# Altium PCB PCB.PcbDoc
Units mm, origin at the board's own origin, x right, y up, seen from the top; angles counter-clockwise.
Board outline 44.8 x 23.7 mm, 2 copper layers (Top Layer, Bottom Layer), stack 1.18 mm thick; 16 components, 13 nets, 70 pads, 17 vias.
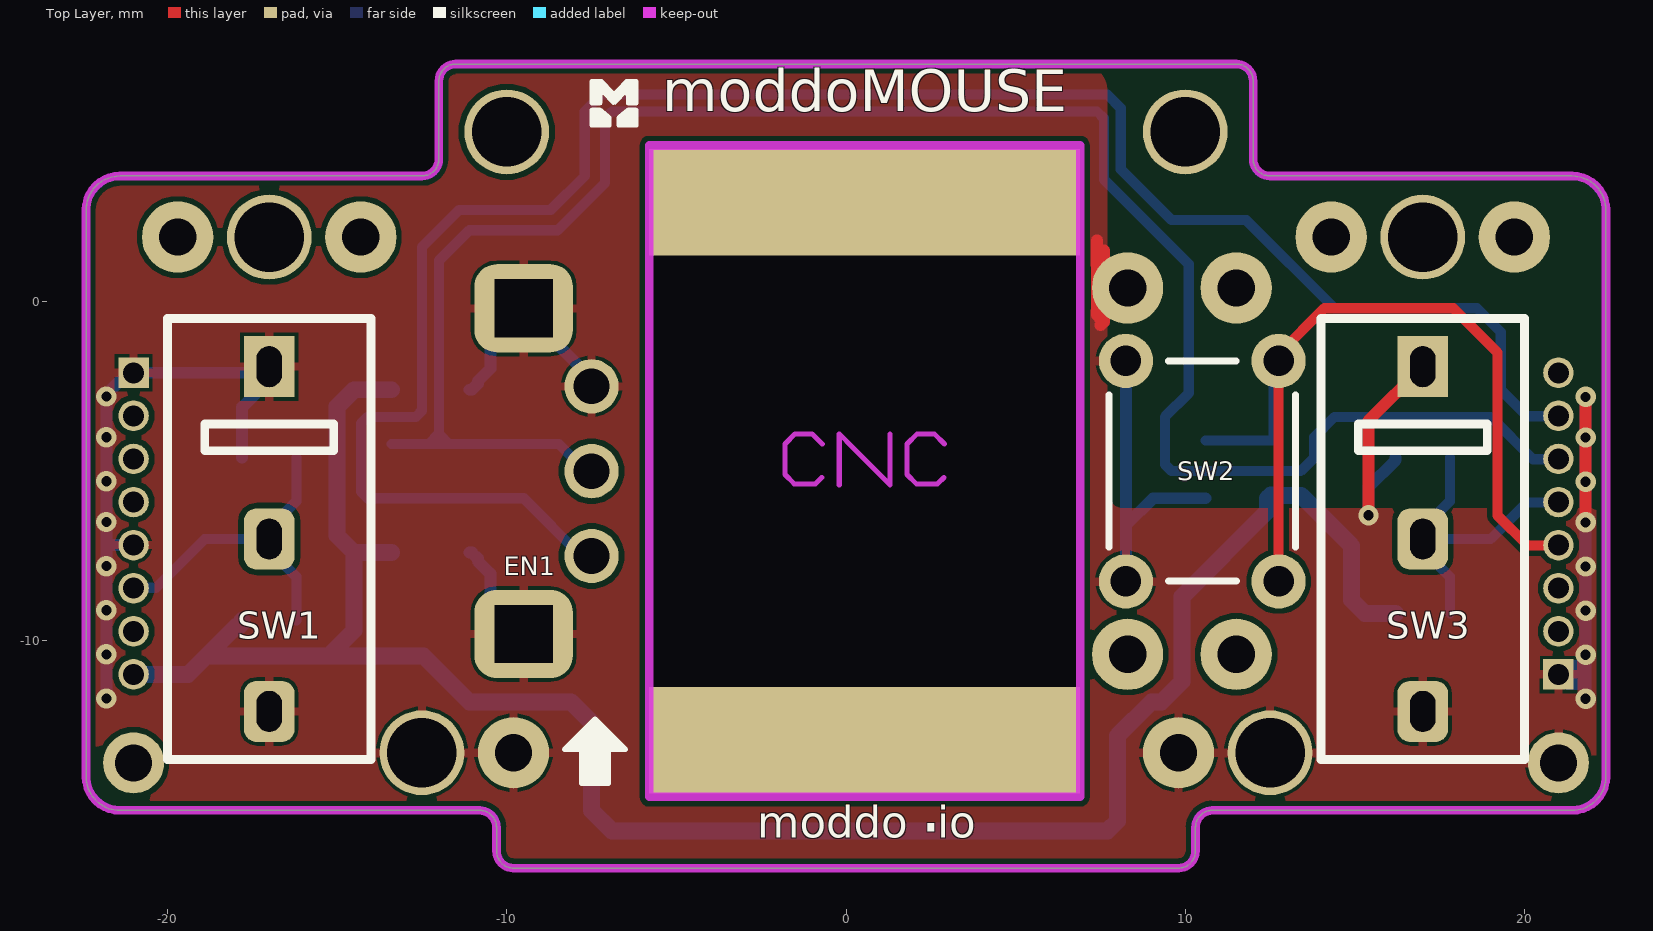
[diagram p0: Top Layer view]
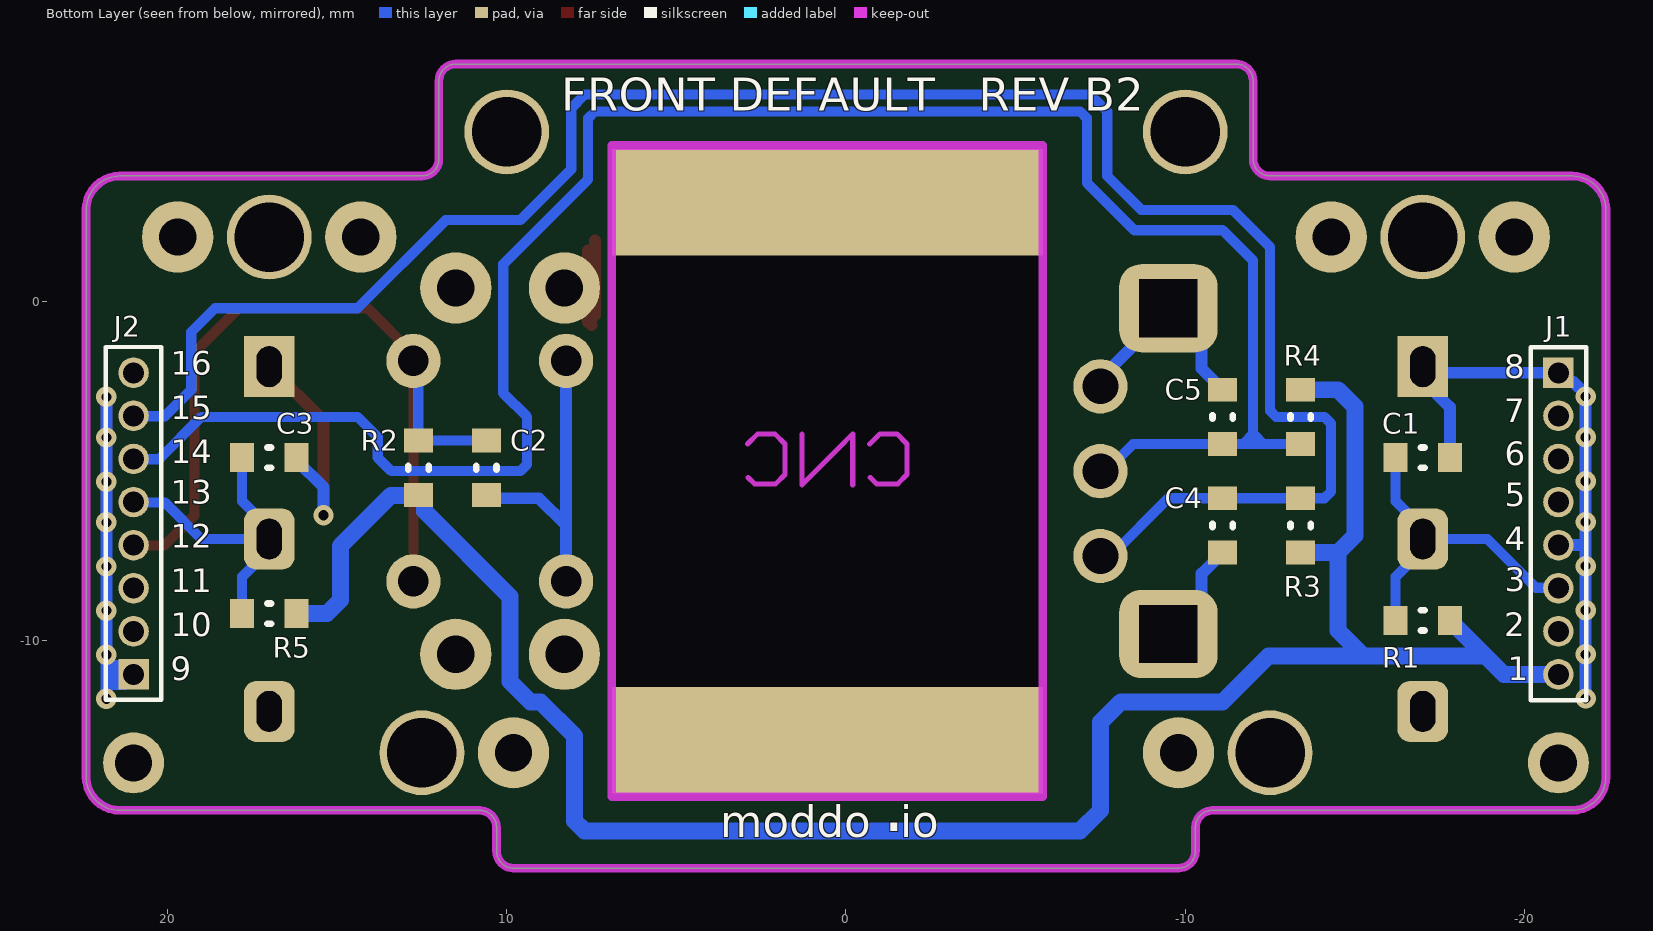
[diagram p1: Bottom Layer view, seen from below]
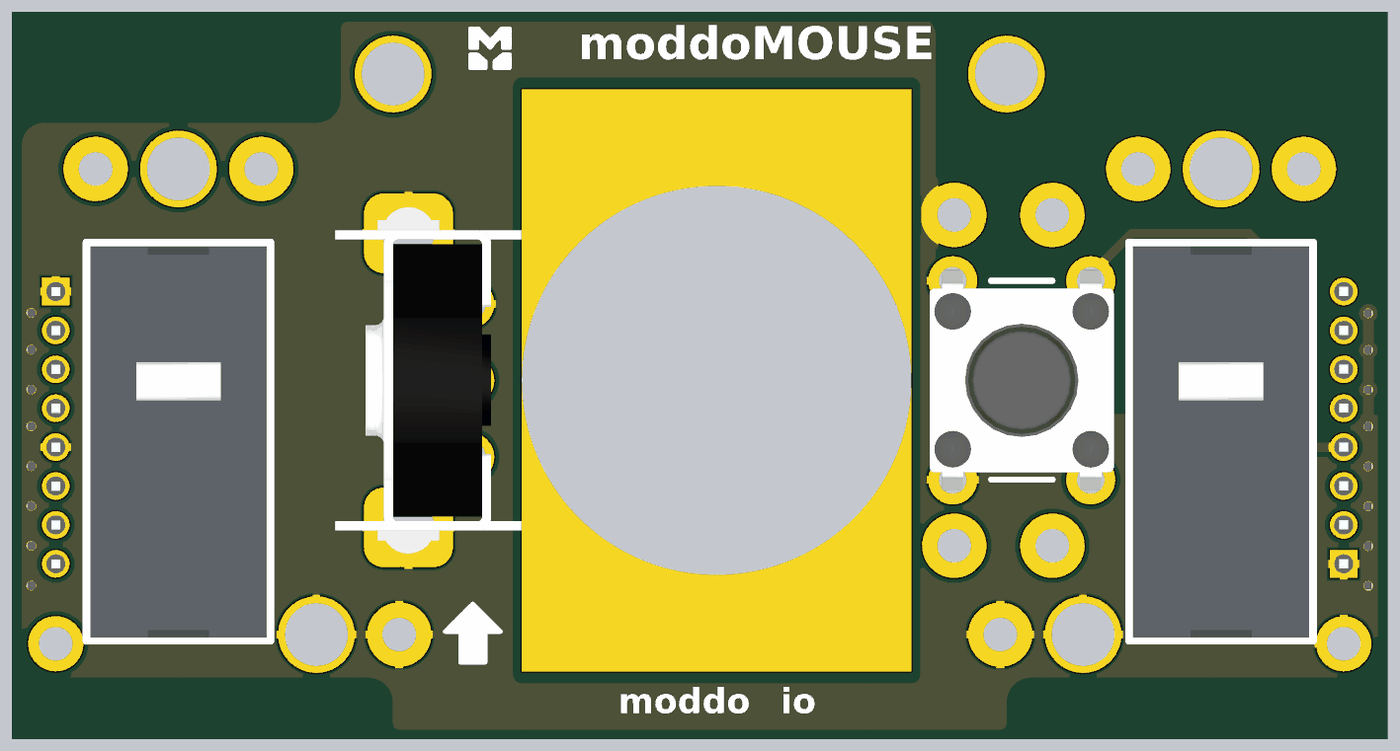
[diagram p2: 3D render of the assembled board from above, using the file's embedded part models]
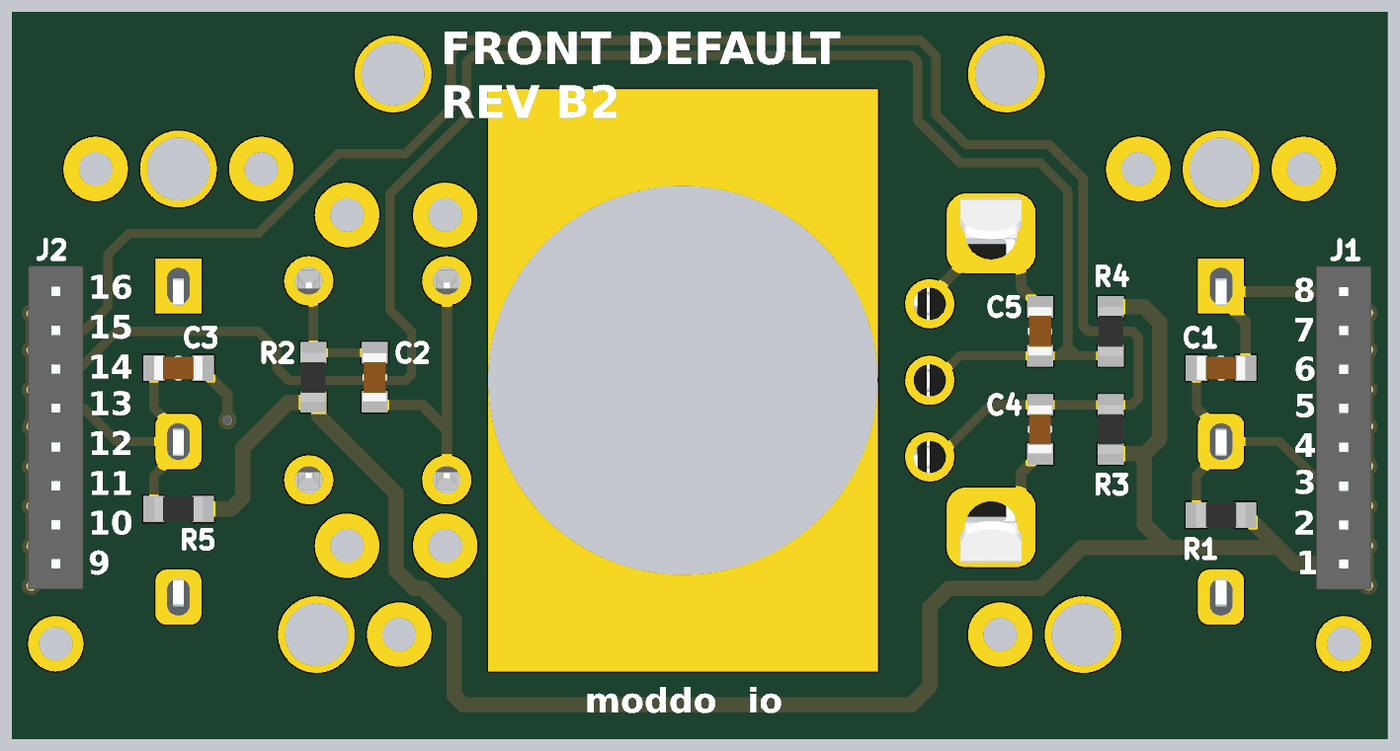
[diagram p3: 3D render of the assembled board from below, using the file's embedded part models]

## Layer stack, top to bottom
Top Solder: solder mask 0.0102, Solder Resist, Dk 3.5
Top Layer: signal copper 0.0356
Dielectric 1: dielectric 1.1086, FR-4, Dk 4.8
Bottom Layer: signal copper 0.0356
Bottom Solder: solder mask 0.0102, Solder Resist, Dk 3.5

## Board outline
-21.4,-15 -10.8,-15 cw(c-10.8,-15.5) -10.3,-15.5 -10.3,-16.2 ccw(c-9.8,-16.2) -9.8,-16.7 9.8,-16.7 ccw(c9.8,-16.2) 10.3,-16.2 10.3,-15.5 cw(c10.8,-15.5) 10.8,-15 21.4,-15 ccw(c21.4,-14) 22.4,-14 22.4,2.7 ccw(c21.4,2.7) 21.4,3.7 12.5,3.7 cw(c12.5,4.2) 12,4.2 12,6.5 ccw(c11.5,6.5) 11.5,7 -11.5,7 ccw(c-11.5,6.5) -12,6.5 -12,4.2 cw(c-12.5,4.2) -12.5,3.7 -21.4,3.7 ccw(c-21.4,2.7) -22.4,2.7 -22.4,-14 ccw(c-21.4,-14)

## Design rules (kind name [scope] priority, off if disabled: settings)
BoardOutlineClearance [All] p1: gap=0.2 ignorepadtopadclearanceinfootprint=FALSE
Clearance GND_bot [InNamedPolygon('GND_bot')] p1: gap=0.2 ignorepadtopadclearanceinfootprint=FALSE
Clearance GND_top [InNamedPolygon('GND_top')] p2: gap=0.1 ignorepadtopadclearanceinfootprint=FALSE
Clearance [All] p3: gap=0.16 ignorepadtopadclearanceinfootprint=FALSE
HoleSize [All] p1: absolutevalues=TRUE maxlimit=20 minlimit=0.025 maxpercent=80.000 minpercent=20.000
MinimumSolderMaskSliver [All] p1: minsoldermaskwidth=0.05
PolygonConnect [All] p1: thpad.connectstyle=Relief thpad.reliefconductorwidth=0.254 thpad.reliefentries=4 thpad.polygonreliefangle="90 Angle" thpad.airgapwidth=0.1 smdpad.connectstyle=Relief smdpad.reliefconductorwidth=0.254 smdpad.reliefentries=4 smdpad.polygonreliefangle="90 Angle" smdpad.airgapwidth=0.1 via.connectstyle=Direct via.reliefconductorwidth=0.254 via.reliefentries=4 via.polygonreliefangle="90 Angle" via.airgapwidth=0.254
RoutingVias [All] p1: holewidth=0.3 width=0.4 viastyle="Through Hole" minholewidth=0.3 minwidth=0.4 maxholewidth=2 maxwidth=10
SilkToSilkClearance [All] p1: silktosilkclearance=0.01
SilkToSolderMaskClearance [IsPad] p1: minsilkscreentomaskgap=0.001 clearancetoexposedcopper=TRUE
SolderMaskExpansion [All] p1: expansion=0.05 istentingtop=FALSE
SupplyNets "Schematic Supply Nets_1" [InNet('GND')] p1: voltage=0.000
SupplyNets "Schematic Supply Nets" [InNet('VDD_EXP')] p2: voltage=0.000
SupplyNets "Schematic Supply Nets_2" [InNet('VBUS')] p3: voltage=0.000
UnRoutedNet [All] p1: checkbadconnections=TRUE
Width [All] p1: maxlimit=2.54 minlimit=0.089 preferedwidth=0.254
25 further rules are at their usual default settings.

## Components (designator, comment, footprint, x,y, rotation, side; value= is the part's Value field where it differs from the comment)
C1 "CL05B104KA5NNNC" CAP0603 -17,-4.6 r0 bottom value=DNP
C2 "CL05B104KA5NNNC" CAP0603 10.6,-4.9 r90 bottom value=DNP
C3 "CL05B104KA5NNNC" CAP0603 17,-4.6 r0 bottom value=DNP
C4 "CL05B104KA5NNNC" CAP0603 -11.1,-6.6 r90 bottom value=DNP
C5 "CL05B104KA5NNNC" CAP0603 -11.1,-3.4 r270 bottom value=DNP
EN1 "" THROUGH_SHAFT_ENCODER_9MM -7.5,-5 r90 top
J1 "1.27mm_8pins" HEADER_MALE_1_27mm_8p_HEIGHT_1mm -21,-2.1 r270 bottom
J2 "1.27mm_8pins" HEADER_MALE_1_27mm_8p_HEIGHT_1mm 21,-10.99 r90 bottom
R1 "" RES0603 -17,-9.4 r0 bottom value=DNP
R2 "" RES0603 12.6,-4.9 r90 bottom value=DNP
R3 "" RES0603 -13.4,-6.6 r90 bottom value=DNP
R4 "" RES0603 -13.4,-3.4 r270 bottom value=DNP
R5 "" RES0603 17,-9.2 r0 bottom value=DNP
SW1 "Microswitch" Microswitch -17,-7 r0 top
SW2 "TS02-66-70-BK-100-SCR-D" TS02-66-70-BK-100-SCR-D 10.5,-5 r90 top
SW3 "Microswitch" Microswitch 17,-7 r0 top

## Footprints (in the part's own frame and the unit in brackets; to place one, negate y for a bottom-side part, rotate by r counter-clockwise, add the part's x,y. Pads: shape width x height; smd on the part's side, far side on the other; paste and mask are expansions set on the pad)
CAP0603 [mm]
  rect 0.7x0.85 smd mask+0.05: 1(-0.8,0) 2(0.8,0)
  silkscreen extent -0.05,-0.3 0.05,0.3, body extent -0.8,-0.4 0.8,0.4, height 0.79
HEADER_MALE_1_27mm_8p_HEIGHT_1mm [mm]
  rect 0.9x0.9 hole 0.62 mask+0.05: 1(0,0)
  round 0.9 hole 0.62 mask+0.05: 2(1.27,0) 3(2.54,0) 4(3.81,0) 5(5.08,0) 6(6.35,0) 7(7.62,0) 8(8.89,0)
  silkscreen extent -0.75,-0.82 9.65,0.82, body extent -0.83,-0.9 9.73,0.9, height 4.46
Microswitch [mm]
  rect 1.5x1.8 hole 0.75 slot 1.2 at 90 deg mask+0.05: 1(0,5.08)
  rrect50% 1.5x1.8 hole 0.75 slot 1.2 at 90 deg mask+0.05: 2(0,0) 3(0,-5.08)
  silkscreen extent -3,-6.5 3,6.5, body extent -2.88,-6.4 2.88,6.35, height 7.25
RES0603 [mm]
  rect 0.7x0.85 smd mask+0.05: 1(-0.8,0) 2(0.8,0)
  silkscreen extent -0.05,-0.3 0.05,0.3, body extent -0.8,-0.4 0.8,0.4, height 0.47
THROUGH_SHAFT_ENCODER_9MM [mm]
  round 1.6 hole 1.05 mask+0.05: A(-2.5,0) B(0,0) C(2.5,0)
  rrect50% 2.6x2.9 hole 1.7 square mask+0.05: MOUNT(-4.8,2) MOUNT(4.8,2)
  body extent -5.94,-1.7 5.94,4.4, height 12.6
TS02-66-70-BK-100-SCR-D [mm]
  round 1.6 hole 0.9: 1(-3.25,2.25) 2(3.25,2.25) 3(-3.25,-2.25) 4(3.25,-2.25)
  silkscreen extent -3.24,-2.75 3.25,2.75, body extent -3.6,-3 3.6,3, height 7

## Part data
C1 C2 C3: library part C0402-1µ0, "CL05 Series 0402 0.1 uF 25 V ±10% X7R Multilayer Ceramic Chip Capacitor"
C4 C5: library part C0402-1µ0, "CL05 Series 0402 0.1 uF 25 V ±10% X7R Multilayer Ceramic Chip Capacitor", Case Code (Imperial)=0402, Case Code (Metric)=1005, Manufacturer=Samsung, Max Operating Temperature=125°C, Min Operating Temperature=-55°C, Tolerance=10%, Voltage Rating=25V, Case/Package=0402, Category="Ceramic Capacitors", ComponentLink1Description=http://www.samsungsem.com/kr/support/product-search/mlcc/CL05B104KA5NNNC.jsp?src-supplier=Digikey, ComponentLink1URL=http://www.samsungsem.com/kr/support/product-search/mlcc/CL05B104KA5NNNC.jsp?src-supplier=Digikey, ComponentLink2Description=https://datasheet.octopart.com/CL05B104KA5NNNC-Samsung-Electro-Mechanics-datasheet-116890910.pdf?src-supplier=Future+Electronics, ComponentLink2URL=https://datasheet.octopart.com/CL05B104KA5NNNC-Samsung-Electro-Mechanics-datasheet-116890910.pdf?src-supplier=Future+Electronics, ComponentLink3Description=https://datasheet.octopart.com/CL05B104KA5NNNC-Samsung-datasheet-8326407.pdf?src-supplier=TME, ComponentLink3URL=https://datasheet.octopart.com/CL05B104KA5NNNC-Samsung-datasheet-8326407.pdf?src-supplier=TME, Height=550um, Length=0.039inch, Manufacturer Part Number=CL05B104KA5NNNC, Material=Ceramic, Mounting Technology="Surface Mount", Packaging="Cut Tape", Pricing 1="10000=0.0018, 20000=0.00179, 40000=0.00179, 60000=0.00178, 80000=0.00177 (USD)", RoHS=Yes, RoHS Compliant=Yes, Series=CL, Stock 1=2800000, Supplier 1=Avnet, Supplier Part Number 1=CL05B104KA5NNNC, Thickness=0.022inch, Voltage Rating (DC)=25V, Width=0.02inch
EN1: library part EC10E1220501, "Mechanical Encoder Rotary Incremental Hollow 5mN.m Right Angle Quadrature Digital Square Wave Through Hole PC Pin"
J1 J2: "1.27mm 1.27mm 1A 1 Gold -40℃~+105℃ 8P Phosphor Bronze Through Hole 1x8P Top 4.3mm Square Hole Through Hole,P=1.27mm Female Headers ROHS"
R1 R2 R3 R4 R5: library part Res1
SW2: "Switch Tactile Spst-no 0.05A 12V", Color=Black, Contact Resistance=100mΩ, Insulation Resistance=100MΩ, Manufacturer="Same Sky", Max Current Rating=50mA, Max Operating Temperature=80°C, Max Voltage Rating (DC)=12V, Min Operating Temperature=-30°C, Operating Force=980mN, Supplier Part Number 1=2223-TS02-66-70-BK-100-SCR-D-ND, Category="Tactile Switches", ComponentLink1Description=https://datasheet.octopart.com:443/TS02-66-70-BK-100-SCR-D-Same-Sky-datasheet-183540777.pdf?src-supplier=Same+Sky, ComponentLink1URL=https://datasheet.octopart.com:443/TS02-66-70-BK-100-SCR-D-Same-Sky-datasheet-183540777.pdf?src-supplier=Same+Sky, ComponentLink2Description=https://datasheet.octopart.com:443/TS02-66-70-BK-100-SCR-D-Same-Sky-datasheet-181920466.pdf?src-supplier=Same+Sky, ComponentLink2URL=https://datasheet.octopart.com:443/TS02-66-70-BK-100-SCR-D-Same-Sky-datasheet-181920466.pdf?src-supplier=Same+Sky, ComponentLink3Description=https://datasheet.octopart.com:443/TS02-66-70-BK-100-SCR-D-Same-Sky-datasheet-181920465.pdf?src-supplier=Same+Sky, ComponentLink3URL=https://datasheet.octopart.com:443/TS02-66-70-BK-100-SCR-D-Same-Sky-datasheet-181920465.pdf?src-supplier=Same+Sky, ComponentLink4Description=https://datasheet.octopart.com:443/TS02-66-70-BK-100-SCR-D-CUI-Devices-datasheet-175928973.pdf?src-supplier=Same+Sky, ComponentLink4URL=https://datasheet.octopart.com:443/TS02-66-70-BK-100-SCR-D-CUI-Devices-datasheet-175928973.pdf?src-supplier=Same+Sky, ComponentLink5Description=https://datasheet.octopart.com:443/TS02-66-70-BK-100-SCR-D-CUI-Devices-datasheet-155929901.pdf?src-supplier=Same+Sky, ComponentLink5URL=https://datasheet.octopart.com:443/TS02-66-70-BK-100-SCR-D-CUI-Devices-datasheet-155929901.pdf?src-supplier=Same+Sky, ComponentLink6Description=https://datasheet.octopart.com:443/TS02-66-70-BK-100-SCR-D-CUI-Devices-datasheet-180438921.pdf?src-supplier=IHS, ComponentLink6URL=https://datasheet.octopart.com:443/TS02-66-70-BK-100-SCR-D-CUI-Devices-datasheet-180438921.pdf?src-supplier=IHS, ComponentLink7Description=https://datasheet.octopart.com:443/TS02-66-70-BK-100-SCR-D-Same-Sky-datasheet-182881588.pdf?src-supplier=Electro+Sonic, ComponentLink7URL=https://datasheet.octopart.com:443/TS02-66-70-BK-100-SCR-D-Same-Sky-datasheet-182881588.pdf?src-supplier=Electro+Sonic, ComponentLink8Description=https://datasheet.octopart.com:443/TS02-66-70-BK-100-SCR-D-Same-Sky-datasheet-189105763.pdf?src-supplier=Master+Electronics, ComponentLink8URL=https://datasheet.octopart.com:443/TS02-66-70-BK-100-SCR-D-Same-Sky-datasheet-189105763.pdf?src-supplier=Master+Electronics, ComponentLink9Description=https://datasheet.octopart.com:443/TS02-66-70-BK-100-SCR-D-Same-Sky-datasheet-188930957.pdf?src-supplier=TME, ComponentLink9URL=https://datasheet.octopart.com:443/TS02-66-70-BK-100-SCR-D-Same-Sky-datasheet-188930957.pdf?src-supplier=TME, ComponentLink10Description=https://octopart.com:443/opatz8j6/c1?t=HLP653kfKUnNyLRaY-FaFV0j9z0a6ljyJcAd0g2ioQ_AonTMmNTwU4IVPJnMdy9eIxVQzuuD2Zu3pf7N-gy-D9NxffwwpVrbegg9M7luCdtijzqw1HD8XYM8rr4LEKe8WthgaTICQcVnT4EdaXrmdMRbIv_syAbN7vWeLxd063wKgO5rufBQuoDPxsRiZXaF5zj2j9QuxBlB29jUVY_5bRBrvllIk-1OXrlBRrRDb8qAyP_q7sjIWfGfu8FS9OuYKaYi-jPcp7RsNayvVhYY7F0QXbvDBl27IGeqaU01JtaMs89zYB4bZG8DLFkocbUh-1087gIX4bVPJQCA7y3bbMeEPsiQw70TGyHqnWLUSeqz4Ubouw&src-supplier=Compliance+Statements, ComponentLink10URL=https://octopart.com:443/opatz8j6/c1?t=HLP653kfKUnNyLRaY-FaFV0j9z0a6ljyJcAd0g2ioQ_AonTMmNTwU4IVPJnMdy9eIxVQzuuD2Zu3pf7N-gy-D9NxffwwpVrbegg9M7luCdtijzqw1HD8XYM8rr4LEKe8WthgaTICQcVnT4EdaXrmdMRbIv_syAbN7vWeLxd063wKgO5rufBQuoDPxsRiZXaF5zj2j9QuxBlB29jUVY_5bRBrvllIk-1OXrlBRrRDb8qAyP_q7sjIWfGfu8FS9OuYKaYi-jPcp7RsNayvVhYY7F0QXbvDBl27IGeqaU01JtaMs89zYB4bZG8DLFkocbUh-1087gIX4bVPJQCA7y3bbMeEPsiQw70TGyHqnWLUSeqz4Ubouw&src-supplier=Compliance+Statements, ComponentLink11Description=https://octopart.com:443/opatz8j6/c1?t=70fxgALqLpNjG_K9rPovwjysU7jzIpdyzzOEfmqjcTOs-6ROmuQBhYmqs_ZuAcaqBIATg-po2KHNT8FFRDBRYIL0_klCBg093_lnv4m-VGCcxpH2tv7ZoDf42NqrFcaiS2p9v1HLMgL58Bvgkh7fWiFupQqqJcboTLtiFznQTeSRB_YWVsAUcqmYMh2aDwt2rP0HYapAehBpzXszozGpJmInMSOs89qtbfp5XPDIds3FFewjYOYywpW73NyliGrA4cmELQKKu9WCRcDeI_p_KBFSh0TkHYgoFAYL7Wsi2MddJKeTwre8sAVdxTEufmEfLTJTVqSle3Q2DFxEX0bFsJRtku0Ewjz7V8cehC3yuXL6NI5jn2H_FXM&src-supplier=Compliance+Statements, ComponentLink11URL=https://octopart.com:443/opatz8j6/c1?t=70fxgALqLpNjG_K9rPovwjysU7jzIpdyzzOEfmqjcTOs-6ROmuQBhYmqs_ZuAcaqBIATg-po2KHNT8FFRDBRYIL0_klCBg093_lnv4m-VGCcxpH2tv7ZoDf42NqrFcaiS2p9v1HLMgL58Bvgkh7fWiFupQqqJcboTLtiFznQTeSRB_YWVsAUcqmYMh2aDwt2rP0HYapAehBpzXszozGpJmInMSOs89qtbfp5XPDIds3FFewjYOYywpW73NyliGrA4cmELQKKu9WCRcDeI_p_KBFSh0TkHYgoFAYL7Wsi2MddJKeTwre8sAVdxTEufmEfLTJTVqSle3Q2DFxEX0bFsJRtku0Ewjz7V8cehC3yuXL6NI5jn2H_FXM&src-supplier=Compliance+Statements, ComponentLink12Description=https://octopart.com:443/opatz8j6/c1?t=0M2gUtPNxCIFKztzr0ORoQp74-qqkM508TPT7wg6m0fN_GA_OkfieEk8EIqSK9t5NbTvw4RdocQjUPrVJcY4NvfdBN--JLXOnsBa5bEMLNaIzwiYtbFg_6z_wR3zqnDTdSeF_oIuOYO8CYFrj75SMWMnab9KxghoES98oqWa6u9tO-Rmbu1W1tT6emVTSCYp7BgLb3OBYN-dQzTQZIBGhGfaphAjKsycwfMKwTeGkST-ilBj1Z_gxNVAgV-6yKJLuy_GAbFai0Kg7uavY94pLOpbiRI-h0GWb66rsUlTT5xwqO7ZyWRlLnQY9NYeXMFqEYDrJCNP-b1rzYCCJcH7sxmr3xVo_XKPUQ&src-supplier=Compliance+Statements, ComponentLink12URL=https://octopart.com:443/opatz8j6/c1?t=0M2gUtPNxCIFKztzr0ORoQp74-qqkM508TPT7wg6m0fN_GA_OkfieEk8EIqSK9t5NbTvw4RdocQjUPrVJcY4NvfdBN--JLXOnsBa5bEMLNaIzwiYtbFg_6z_wR3zqnDTdSeF_oIuOYO8CYFrj75SMWMnab9KxghoES98oqWa6u9tO-Rmbu1W1tT6emVTSCYp7BgLb3OBYN-dQzTQZIBGhGfaphAjKsycwfMKwTeGkST-ilBj1Z_gxNVAgV-6yKJLuy_GAbFai0Kg7uavY94pLOpbiRI-h0GWb66rsUlTT5xwqO7ZyWRlLnQY9NYeXMFqEYDrJCNP-b1rzYCCJcH7sxmr3xVo_XKPUQ&src-supplier=Compliance+Statements, ComponentLink13Description=https://octopart.com:443/opatz8j6/c1?t=diif9Q9lWxKVNFgYf2ypxkBIpJy_xgH8lB9SlF-sgjeEzbBCUVmT_nzSoRgXF36nPrchZjg3iSgBGugOu1kM5DFk3dZCPjGsZ2AECwKBw0yNVqZziTPdJApiVqJ2N8tp3yywOshnCqmZxG2i-lqiFfHMSfwXJbIAb0IWzMQMxGRWHhSJomd94oD279jFTGt8oizERBWbfb88NO9_Xr3EVZhRepn2f-WGygd1GS9heeHI2QHR3-nScg2II5lErYeUXOg5oJ91TW5jc1ptKnvIg9-7FjmYCEPJ7ClYA3CtivUmUoH3UgqEViyww75S0eqfJ7jiv1ohBfmjBBBnsjsMwfP_bN0qkEs5FUvu0_Goiq3pWEomZw&src-supplier=Compliance+Statements, ComponentLink13URL=https://octopart.com:443/opatz8j6/c1?t=diif9Q9lWxKVNFgYf2ypxkBIpJy_xgH8lB9SlF-sgjeEzbBCUVmT_nzSoRgXF36nPrchZjg3iSgBGugOu1kM5DFk3dZCPjGsZ2AECwKBw0yNVqZziTPdJApiVqJ2N8tp3yywOshnCqmZxG2i-lqiFfHMSfwXJbIAb0IWzMQMxGRWHhSJomd94oD279jFTGt8oizERBWbfb88NO9_Xr3EVZhRepn2f-WGygd1GS9heeHI2QHR3-nScg2II5lErYeUXOg5oJ91TW5jc1ptKnvIg9-7FjmYCEPJ7ClYA3CtivUmUoH3UgqEViyww75S0eqfJ7jiv1ohBfmjBBBnsjsMwfP_bN0qkEs5FUvu0_Goiq3pWEomZw&src-supplier=Compliance+Statements, ComponentLink14Description=https://octopart.com:443/opatz8j6/c1?t=imcCfIDy5o_ml50jtfjPxlR6DZ_wJD5zN0zQzufCnUTvUT0YJEIpXllkHao9xdejupS_czezSO7NHYOkFFzvO-KWfitz_4VyM9E57VLf2lJat0Li5JMhp_PVSZeq-2lKDWqSwTzEPRMj8I_f-Bcni8gKS6mmu2GnDZ8MMk2UfHI6ioBV2HvYNDzpuGAzvtKEZz1R2H6q5jLC2OKgZnoSEYJSrhZ-HoMyrn1bi6_ivQyBh6WR3Osn0n3mf6szmji0OW0cS32L0RTDLzbe5apsoDXB1RAJOqIijn7fzRHDOhWtDUqiBOOdw2DWMA6LC7TFGd2P5An41jYudu2603zI8PWHVSPGioqRMTziF1Fy9Kg1Zw3IXdiPQyQ&src-supplier=Compliance+Statements, ComponentLink14URL=https://octopart.com:443/opatz8j6/c1?t=imcCfIDy5o_ml50jtfjPxlR6DZ_wJD5zN0zQzufCnUTvUT0YJEIpXllkHao9xdejupS_czezSO7NHYOkFFzvO-KWfitz_4VyM9E57VLf2lJat0Li5JMhp_PVSZeq-2lKDWqSwTzEPRMj8I_f-Bcni8gKS6mmu2GnDZ8MMk2UfHI6ioBV2HvYNDzpuGAzvtKEZz1R2H6q5jLC2OKgZnoSEYJSrhZ-HoMyrn1bi6_ivQyBh6WR3Osn0n3mf6szmji0OW0cS32L0RTDLzbe5apsoDXB1RAJOqIijn7fzRHDOhWtDUqiBOOdw2DWMA6LC7TFGd2P5An41jYudu2603zI8PWHVSPGioqRMTziF1Fy9Kg1Zw3IXdiPQyQ&src-supplier=Compliance+Statements, ComponentLink15Description=https://octopart.com:443/opatz8j6/c1?t=kKijr8Z3YtJHTTjWnXb3xh0DJP5EzxeX4UFkx4TEZ6Cz0Z832s2bRldFgYZlCpaXiK9LCmfdBkdCa6SQTrNfeR21pT66xN4z56ytO83LXIFW6jqhfe0BF4PCg9LZ01M04qLlAqJjGu9g9SeA4zCDxwvuczhHHSMbXOPUkjBKcuT-covQ3TDYxKJX1WQbLINFlqNmhVdmt0nNVmCHYY5UlYZquJcZxWugtPfk0hXKeUZrRbCaVG2WVxMsTTDZa3ihWnkhx37ifFF9Olm0_Nb0GN6vgv_2MEW77TYbpXRH10yY7gT6N9FBAuGfJTCPb3AxGTSm9otgR3_KqACkaD-fKVuVVtpYMw7tLA&src-supplier=Compliance+Statements, ComponentLink15URL=https://octopart.com:443/opatz8j6/c1?t=kKijr8Z3YtJHTTjWnXb3xh0DJP5EzxeX4UFkx4TEZ6Cz0Z832s2bRldFgYZlCpaXiK9LCmfdBkdCa6SQTrNfeR21pT66xN4z56ytO83LXIFW6jqhfe0BF4PCg9LZ01M04qLlAqJjGu9g9SeA4zCDxwvuczhHHSMbXOPUkjBKcuT-covQ3TDYxKJX1WQbLINFlqNmhVdmt0nNVmCHYY5UlYZquJcZxWugtPfk0hXKeUZrRbCaVG2WVxMsTTDZa3ihWnkhx37ifFF9Olm0_Nb0GN6vgv_2MEW77TYbpXRH10yY7gT6N9FBAuGfJTCPb3AxGTSm9otgR3_KqACkaD-fKVuVVtpYMw7tLA&src-supplier=Compliance+Statements, Contact Plating=Silver, Electrical Life=100kcycles, Height=3.5mm, Housing Material="Stainless Steel", Length=6mm, Lifecycle Status=Production, Manufacturer Part Number=TS02-66-70-BK-100-SCR-D, Number of Positions=1, Pricing 1="1=0.1, 10=0.093, 25=0.0872, 100=0.0788, 250=0.07328, 500=0.0692, 1000=0.06531, 3000=0.05961, 5000=0.0572 (USD)", REACH SVHC=Yes, RoHS=Compliant, Stock 1=2978, Supplier 1=DigiKey, Terminal Material=Brass, Throw Configuration=SPST

## Free pads (board coordinates)
  round 1.8 hole 1.1: ""(-21,-13.6) ""(21,-13.6)
  round 2.1 hole 1.1: ""(-19.7,1.9) ""(-14.3,1.9) ""(-9.8,-13.3) ""(8.3,-10.4) ""(8.3,0.4) ""(9.8,-13.3) ""(11.5,-10.4) ""(11.5,0.4) ""(14.3,1.9) ""(19.7,1.9)
  round 2.5 hole 2.05: ""(-17,1.9) ""(-12.5,-13.3) ""(-10,5) ""(10,5) ""(12.5,-13.3) ""(17,1.9)
  rect 12.7x19 hole 12.7 square unplated: ""(0.55,-5)

## Via types
v1: diameter 0.6, hole 0.3, Top Layer to Bottom Layer, tented both sides, 17 vias

## Nets (pads, with @x,y where several pads share a name; then routed paths per layer and width w, separated by ;. In a path a pad name is that pad's centre, name@x,y a point inside that pad or via, vN(x,y) a via of type N, cw(c..) or ccw(c..) an arc to the next point about the centre after c; other vN are vias at no path point)
BUTTON: J1.7
CLICK_LEFT: C1.2 J1.6 R1.2 SW1.2 | length 10.1
  Bottom Layer w0.3: J1.6 -20.989,-8.439 -20.339,-8.439 -18.9,-7 SW1.2 ; R1.2 -16.2,-8.109 -17,-7.309 SW1.2 ; C1.2 -16.2,-5.891 -17,-6.691 SW1.2
CLICK_MIDDLE: C2.2 J2.4 R2.2 SW2.3 SW2.4 | length 25.6
  Top Layer w0.3: SW2.3 SW2.4 12.75,-1.55 14.1,-0.2 17.9,-0.2 19.2,-1.5 19.2,-6.3 20.09,-7.19 J2.4@21,-7.19
  Bottom Layer w0.3: C2.2 R2.2 12.6,-1.9 SW2.4
CLICK_RIGHT: C3.2 J2.5 R5.2 SW3.2 | length 9.7
  Bottom Layer w0.3: R5.2 17.8,-8.109 17,-7.309 SW3.2 ; C3.2 17.8,-5.891 17,-6.691 SW3.2 ; J2.5@21,-5.92 20.08,-5.92 19,-7 SW3.2
ENC_A: C4.2 EN1.A J2.7 R3.2 | length 58.8
  Bottom Layer w0.3: EN1.A -7.8,-7.5 -9.5,-5.8 C4.2 R3.2 -14.1,-5.8 -14.3,-5.6 -14.3,-3.6 -14.1,-3.4 -12.676,-3.4 -12.5,-3.224 -12.5,1.6 -11.4,2.7 -8.7,2.7 -7.7,3.7 -7.7,5.6 -7.2,6.1 7.7,6.1 8.1,5.7 8.1,3.9 9.6,2.4 11.8,2.4 14.4,-0.2 18.6,-0.2 19.3,-0.9 19.3,-2.6 20.08,-3.38 J2.7@21,-3.38
ENC_B: C5.2 EN1.B J2.6 R4.2 | length 59.9
  Bottom Layer w0.3: R4.2 -12.3,-4.2 ; EN1.B -7.668,-5 -8.468,-4.2 C5.2 -11.7,-4.2 ; J2.6@21,-4.65 20.25,-4.65 19,-3.4 14.4,-3.4 13.8,-4 13.8,-4.6 13.4,-5 9.6,-5 9.4,-4.8 9.4,-3.4 10.1,-2.7 10.1,1.1 7.6,3.6 7.6,5.4 7.4,5.6 -6.9,5.6 -7.1,5.4 -7.1,3.5 -8.5,2.1 -11.1,2.1 -12,1.2 -12,-3.9 ; -12.3,-4.2 -12.076,-4.2 ; -12.3,-4.2 -12,-3.9 ; -12.076,-4.2 -11.7,-4.2 ; -12.076,-4.2 -12,-4.124 -12,-3.9 ; -12,-3.9 -11.7,-4.2
FRONT_GPIO: J1.2
FRONT_INT: J1.3
GND: C1.1 C2.1 C3.1 C4.1 C5.1 EN1.C EN1.MOUNT J1.1 J1.5 J2.1 pad.@8.3,0.4 pad.@9.8,-13.3 pad.@12.5,-13.3 pad.@21,-13.6 pad.@-9.8,-13.3 pad.@-12.5,-13.3 SW1.1 SW1.3 SW2.1 SW2.2 SW3.1 SW3.3 | length 63.3
  Top Layer w0.35: 7.4,1.8 7.4,-0.4 7.5,-0.5 ; 7.5,-0.7 7.6,-0.6 7.6,1.5 ; v1(15.4,-6.3) 15.4,-3.52 SW3.1 ; v1(21.8,-6.51) v1(21.8,-5.31) v1(21.8,-4.01) v1(21.8,-2.81)
  Bottom Layer w0.35: v1(-21.8,-11.7) v1(-21.8,-10.4) v1(-21.8,-9.1) v1(-21.8,-7.8) -21.8,-7.15 ; J1.5 -21.77,-7.18 -21.8,-7.15 ; C1.1 -17.8,-3.112 -17,-2.312 SW1.1 -17.18,-2.1 J1.1 -21.275,-2.375 -21.443,-2.375 -21.8,-2.732 v1(-21.8,-4) v1(-21.8,-5.3) v1(-21.8,-6.5) -21.8,-7.15 ; C4.1 -11.025,-7.4 -10.85,-7.575 -10.85,-7.65 -10.482,-8.018 -10.482,-8.818 EN1.MOUNT@-9.5,-9.8 ; C5.1 -11.025,-2.6 -10.85,-2.425 -10.85,-2.35 -10.482,-1.982 -10.482,-1.182 -9.5,-0.2 -9.5,-0.275 -7.5,-2.275 EN1.C ; SW2.1 8.25,-6.6 ; SW2.2 8.25,-6.6 ; C2.1@10.6,-5.8 9.05,-5.8 8.25,-6.6 ; v1(15.4,-6.3) 15.4,-5.475 16.2,-4.675 C3.1 ; v1(21.8,-11.71) 21.8,-11.385 ; v1(21.8,-2.81) v1(21.8,-4.01) v1(21.8,-5.31) v1(21.8,-6.51) v1(21.8,-7.81) v1(21.8,-9.11) v1(21.8,-10.41) 21.8,-10.735 ; J2.1@21.06,-11.06 21.275,-11.275 21.69,-11.275 21.8,-11.385 ; J2.1@21.06,-11.06 21,-11 21.265,-10.735 21.8,-10.735 ; J2.1@21.06,-11.06 21.8,-11.06 ; 21.8,-11.385 21.8,-11.06 ; 21.8,-11.06 21.8,-10.735
  other v1: -21.8,-2.8
I2C_FRONT_CLK: J2.8
I2C_FRONT_DATA: J2.3
VBUS: J1.4
VDD_EXP: J1.8 R1.1 R2.1 R3.1 R4.1 R5.1 | length 62.9
  Bottom Layer w0.5: J1.8 -19.39,-10.99 -18.85,-10.45 ; R1.1 -17.8,-9.475 -17.9,-9.575 -17.975,-9.575 -18.85,-10.45 ; -15.187,-10.387 -14.5,-9.7 -14.5,-7.4 ; R3.1 -14.5,-7.4 ; R4.1 -14.5,-2.6 -15,-3.1 -15,-6.9 -14.5,-7.4 ; R5.1 15.3,-9.2 14.9,-8.8 14.9,-7.2 13.418,-5.718 12.618,-5.718 R2.1 12.525,-5.7 12.425,-5.8 12.425,-6.175 9.9,-8.7 9.9,-11.2 9.3,-11.8 9,-11.8 8,-12.8 8,-15.307 7.707,-15.6 -6.9,-15.6 -7.5,-15 -7.5,-12.4 -8.1,-11.8 -11.1,-11.8 -12.45,-10.45 -18.85,-10.45
pads on no net: J2.2

## Polygon pours and split planes (outlines as drawn)
GND on Top Layer "GND_L01_P000" (solid, pour order 0): -21.4,-15 -10.8,-15 cw(c-10.8,-15.5) -10.3,-15.5 -10.3,-16.2 ccw(c-9.8,-16.2) -9.8,-16.7 9.8,-16.7 ccw(c9.8,-16.2) 10.3,-16.2 10.3,-15.5 cw(c10.8,-15.5) 10.8,-15 21.4,-15 ccw(c21.4,-14) 22.4,-14 22.4,-6.6 ccw(c21.9,-6.6) 21.9,-6.1 8.2,-6.1 cw(c8.2,-5.6) 7.7,-5.6 7.7,6.2 ccw(c6.9,6.2) 6.9,7 -11.5,7 ccw(c-11.5,6.5) -12,6.5 -12,4.2 cw(c-12.5,4.2) -12.5,3.7 -21.4,3.7 ccw(c-21.4,2.7) -22.4,2.7 -22.4,-14 ccw(c-21.4,-14)

## Keep-outs
Keep-Out Layer:
  lines w0.15: -0.714,-5.186 -0.9,-5.373 -1.527,-5.373 -1.8,-5.1 -1.8,-4.2 -1.5,-3.9 -1,-3.9 -0.7,-4.2 ; -0.2,-5.4 -0.2,-3.9 0.2,-4.3 1.3,-5.4 1.3,-3.9 ; 2.886,-5.186 2.7,-5.373 2.073,-5.373 1.8,-5.1 1.8,-4.2 2.1,-3.9 2.6,-3.9 2.9,-4.2
  lines w0.254: -22.4,-14 ccw(c-21.4,-14) -21.4,-15 -10.8,-15 cw(c-10.8,-15.5) -10.3,-15.5 -10.3,-16.2 ccw(c-9.8,-16.2) -9.8,-16.7 9.8,-16.7 ccw(c9.8,-16.2) 10.3,-16.2 10.3,-15.5 cw(c10.8,-15.5) 10.8,-15 21.4,-15 ccw(c21.4,-14) 22.4,-14 22.4,2.7 ccw(c21.4,2.7) 21.4,3.7 12.5,3.7 cw(c12.5,4.2) 12,4.2 12,6.5 ccw(c11.5,6.5) 11.5,7 -11.5,7 ccw(c-11.5,6.5) -12,6.5 -12,4.2 cw(c-12.5,4.2) -12.5,3.7 -21.4,3.7 ccw(c-21.4,2.7) -22.4,2.7 -22.4,-14 ; -5.8,-14.6 -5.8,4.6 6.9,4.6 6.9,-14.6 -5.8,-14.6

## Silkscreen, mask and mechanical layers (free items; w line width, h text height)
Top Overlay:
  drawing of 30 lines, arcs and shapes, not listed
  text "moddoMOUSE" at -5.42,5.2 h2.1
  text "moddo" at -2.611,-16.114 h1.6
  text "." at 2.189,-16.114 h2.5
  text "io" at 2.689,-16.114 h1.6
Bottom Overlay:
  text "FRONT DEFAULT   REV B2" at 8.4,5.3 h1.65
  text "16" at 19.9,-2.4 h1.2
  text "8" at -19.4,-2.5 h1.2
  text "15" at 19.9,-3.7 h1.2
  text "7" at -19.4,-3.8 h1.2
  text "14" at 19.9,-5 h1.2
  text "6" at -19.421,-5.068 h1.2
  text "13" at 19.9,-6.2 h1.2
  text "5" at -19.421,-6.268 h1.2
  text "12" at 19.9,-7.5 h1.2
  text "4" at -19.421,-7.568 h1.2
  text "3" at -19.421,-8.768 h1.2
  text "11" at 19.9,-8.8 h1.2
  text "2" at -19.4,-10.1 h1.2
  text "10" at 19.9,-10.1 h1.2
  text "1" at -19.5,-11.4 h1.2
  text "9" at 19.9,-11.4 h1.2
  text "io" at -1.6,-16.1 h1.6
  text "." at -1.1,-16.1 h2.5
  text "moddo" at 3.7,-16.1 h1.6